# Altium PCB RFID_DC_Pcb.PcbDoc
Units mm, origin at the board's own origin, x right, y up, seen from the top; angles counter-clockwise.
Board outline 82.83 x 45.4 mm, 2 copper layers (Top Layer, Bottom Layer); 45 components, 53 nets, 225 pads, 34 vias.
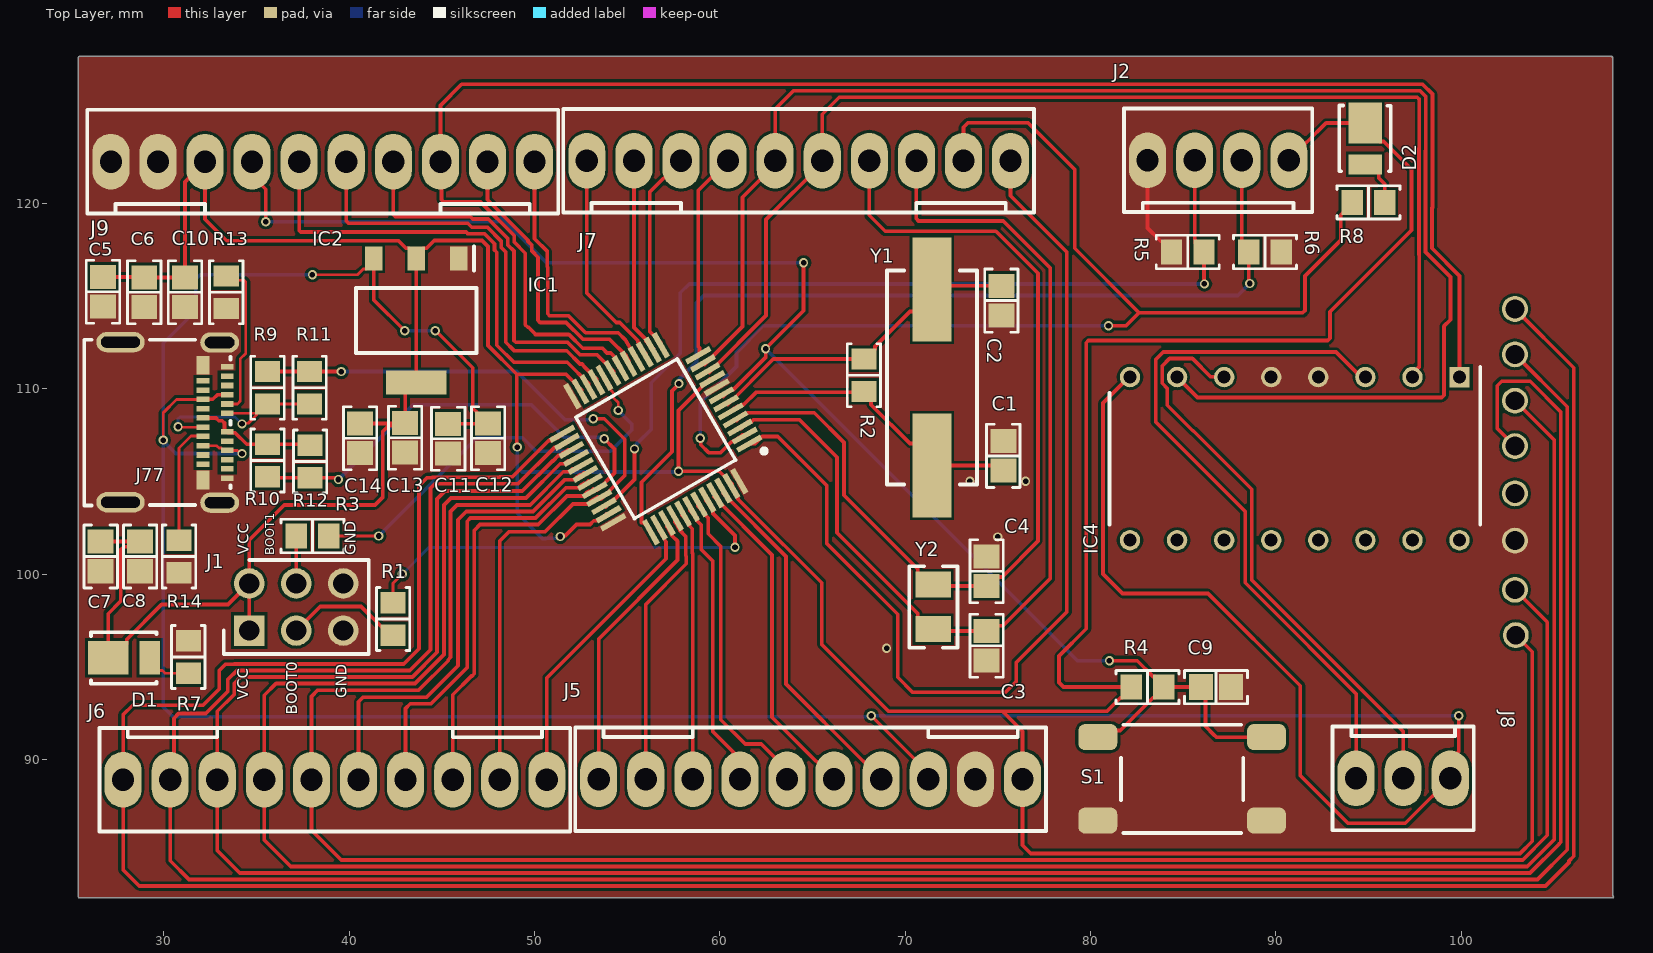
[diagram p0: Top Layer view]
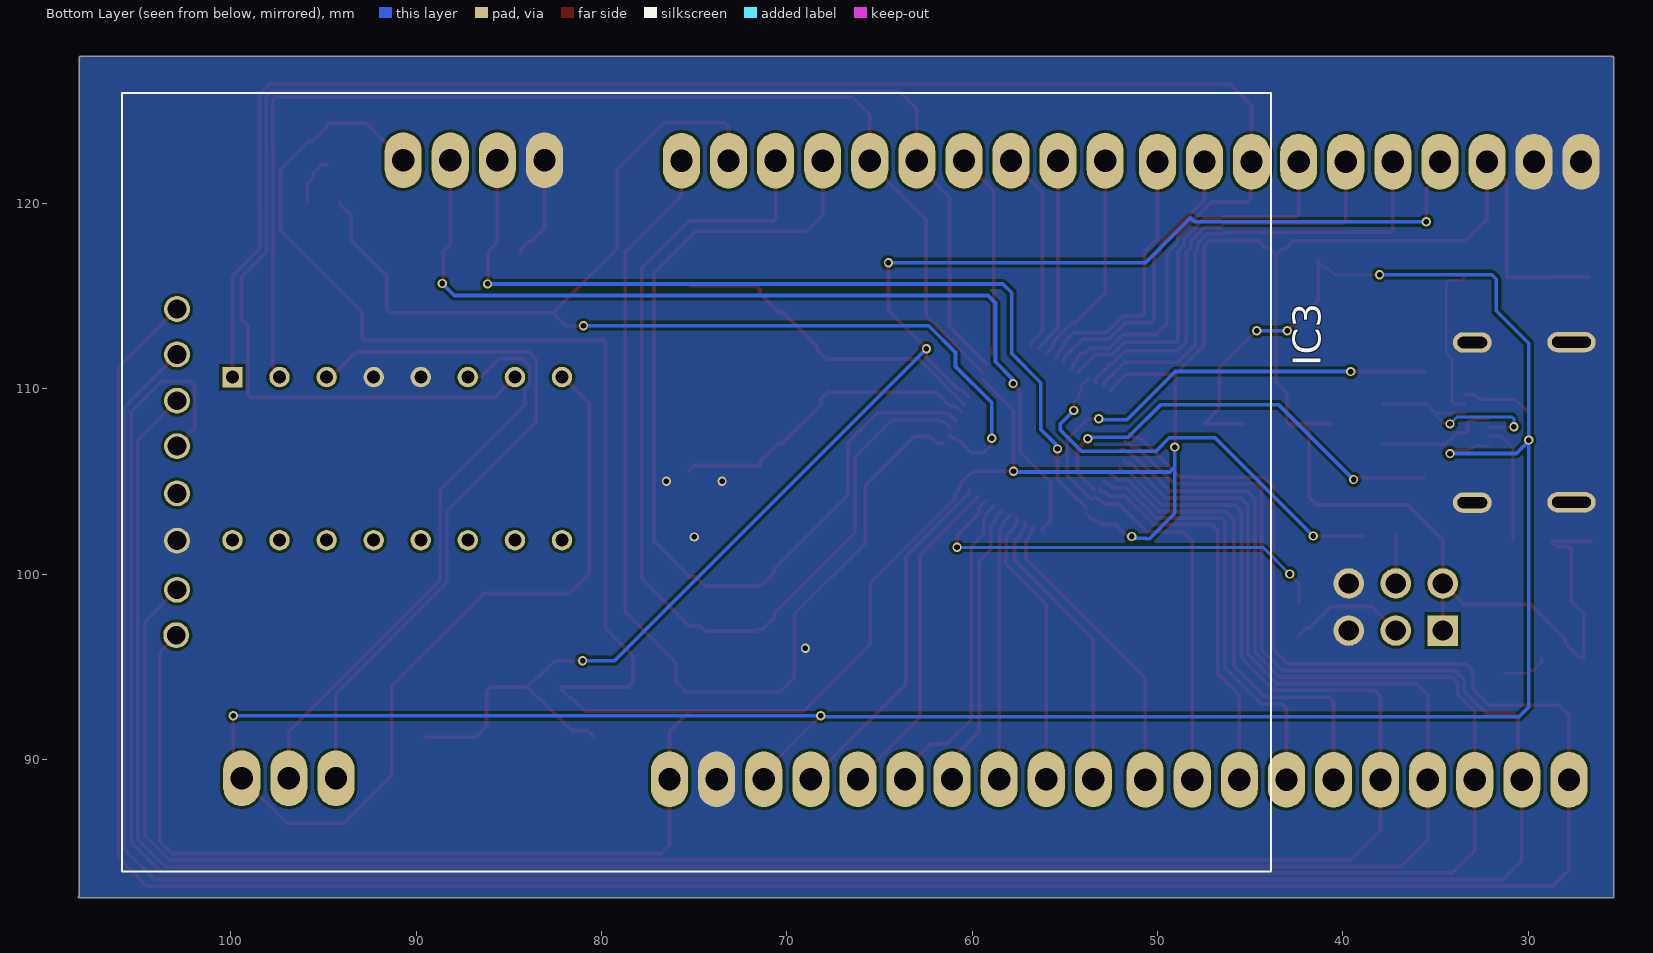
[diagram p1: Bottom Layer view, seen from below]
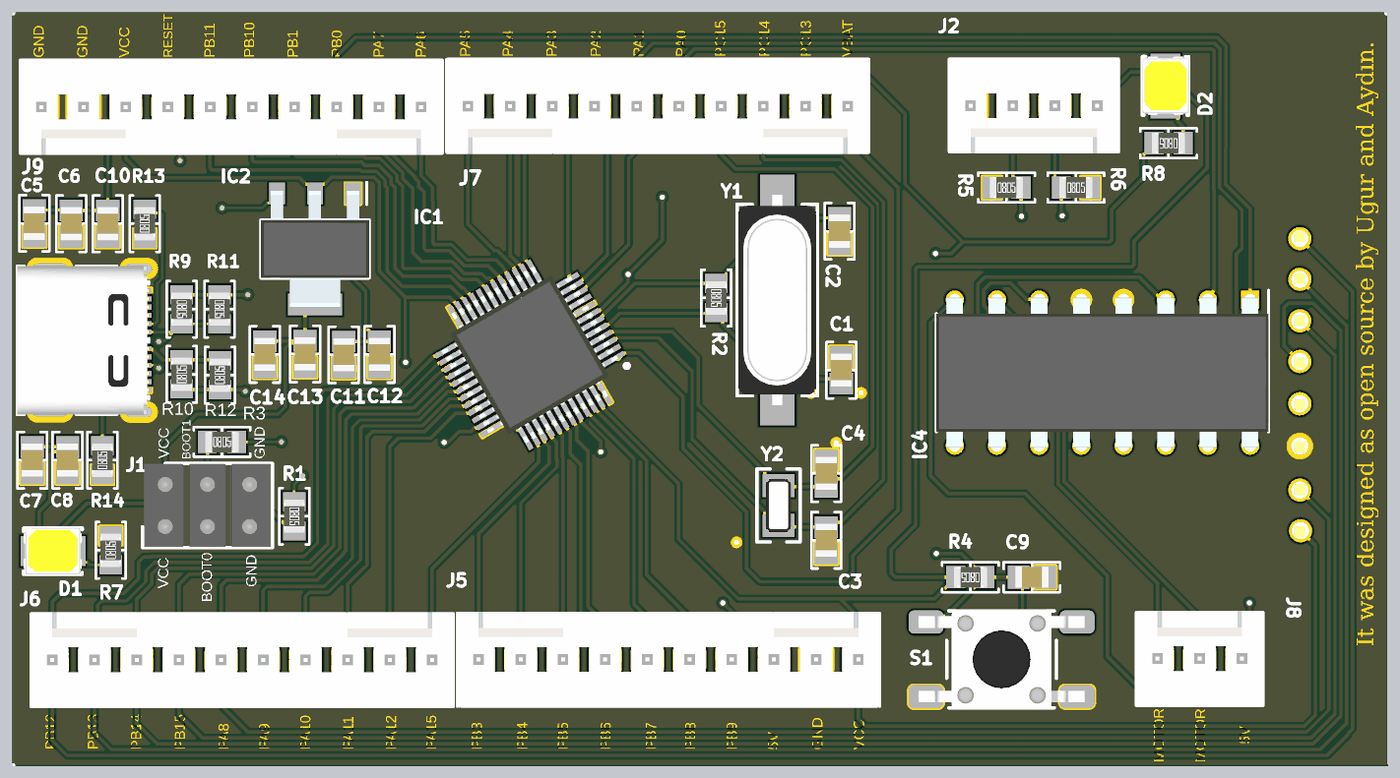
[diagram p2: 3D render of the assembled board from above, using the file's embedded part models]

## Layer stack, top to bottom
Top Solder: solder mask 0.0102, Solder Resist, Dk 3.5
Top Layer: signal copper 0.0356
Dielectric 1: dielectric 0.32, FR-4, Dk 4.8
Bottom Layer: signal copper 0.0356
Bottom Solder: solder mask 0.0102, Solder Resist, Dk 3.5

## Board outline
25.45,82.525 cw(c25.45,82.575) 25.4,82.575 25.4,127.875 cw(c25.45,127.875) 25.45,127.925 108.125,127.925 cw(c108.125,127.875) 108.175,127.875 108.175,82.625 cw(c108.175,82.575) 108.225,82.575 cw(c108.175,82.575) 108.175,82.525

## Design rules (kind name [scope] priority, off if disabled: settings)
Clearance [All] p1: gap=0.152 ignorepadtopadclearanceinfootprint=FALSE
PolygonConnect [All] p1: connectstyle=Direct reliefconductorwidth=0.254 reliefentries=4 polygonreliefangle="90 Angle" airgapwidth=0.254
RoutingVias [All] p1: holewidth=0.5 width=0.8 viastyle="Through Hole" minholewidth=0.3 minwidth=0.5 maxholewidth=1 maxwidth=2
SolderMaskExpansion [All] p1: expansion=0.102 istentingtop=FALSE
Width [All] p1: maxlimit=3 minlimit=0.152 preferedwidth=0.2
30 further rules are at their usual default settings.

## Components (designator, comment, footprint, x,y, rotation, side; value= is the part's Value field where it differs from the comment)
C1 "20pF" "CAP 0805_2012" 75.3,106.375 r270 top
C2 "20pF" "CAP 0805_2012" 75.2,114.75 r90 top
C3 "20pF" "CAP 0805_2012" 74.4,96.125 r90 top
C4 "20pF" "CAP 0805_2012" 74.4,100.15 r270 top
C5 "100nF" "CAP 0805_2012" 26.725,115.225 r90 top
C6 "100nF" "CAP 0805_2012" 28.95,115.2 r90 top
C7 "100nF" "CAP 0805_2012" 26.6,100.95 r90 top
C8 "100nF" "CAP 0805_2012" 28.725,100.95 r90 top
C9 "100nF" "CAP 0805_2012" 86.775,93.9 r180 top
C10 "100nF" "CAP 0805_2012" 31.15,115.2 r90 top
C11 "100nF" "CAP 0805_2012" 45.35,107.3 r90 top
C12 "100nF" "CAP 0805_2012" 47.5,107.325 r90 top
C13 "100nF" "CAP 0805_2012" 43.025,107.35 r90 top
C14 "100nF" "CAP 0805_2012" 40.6,107.325 r90 top
D1 "LED" "CREE J 2835" 27.975,95.475 r180 top
D2 "LED1" "CREE J 2835" 94.825,123.375 r90 top
IC1 "STM32F103C8T6TR" QFP50P900X900X160-48N 56.55,107.3 r210 top
IC2 "AMS1117-3.3" SOT229P700X180-4N 43.625,113.675 r270 top
IC3 "MFRC522 MODULE" RC522 74.375,101.45 r90 bottom
IC4 "L293D" DIP880W50P254L2000H510Q16N 91.025,106.225 r270 top
J1 "0901310763" HDRV6W90P254_2X3_762X500X560P 34.61,96.95 r0 top
J2 "0022272041" "MOLEX KK 0022272041" 86.895,122.325 r0 top
J5 "0022272101" "MOLEX KK 0022272101" 64.9,88.925 r180 top
J6 "0022272101" "MOLEX KK 0022272101" 39.24,88.9 r180 top
J7 "0022272101" "MOLEX KK 0022272101" 64.26,122.3 r0 top
J8 "0022272031" "MOLEX KK 0022272031" 96.875,88.975 r180 top
J9 "0022272101" "MOLEX KK 0022272101" 38.58,122.25 r0 top
J77 "1054500101" "Molex 1054500101" 32.774,108.172 r270 top
R1 "100K" "RES 0805_2012" 42.375,97.575 r270 top
R2 "1M" "RES 0805_2012" 67.775,110.725 r270 top
R3 "100K" "RES 0805_2012" 38.025,102.05 r0 top
R4 "10K" "RES 0805_2012" 83.075,93.9 r180 top
R5 "10K" "RES 0805_2012" 85.25,117.375 r0 top
R6 "10K" "RES 0805_2012" 89.425,117.375 r0 top
R7 "100" "RES 0805_2012" 31.325,95.525 r90 top
R8 "100" "RES 0805_2012" 95,120.05 r180 top
R9 "22" "RES 0805_2012" 35.6,110.05 r270 top
R10 "=Value" "RES 0805_2012" 35.6,106.125 r90 top
R11 "=Value" "RES 0805_2012" 37.875,110.05 r270 top
R12 "=Value" "RES 0805_2012" 37.9,106.075 r90 top
R13 "=Value" "RES 0805_2012" 33.375,115.2 r90 top
R14 "=Value" "RES 0805_2012" 30.825,100.95 r90 top
S1 "FSM4JSMA" "TE FSM4JSMA" 84.95,88.95 r270 top
Y1 "8MHz" "ABRACON ABLS" 71.45,110.6 r270 top
Y2 "32.768kHz" "ABRACON ABS07" 71.525,98.225 r90 top

## Footprints (in the part's own frame and the unit in brackets; to place one, negate y for a bottom-side part, rotate by r counter-clockwise, add the part's x,y. Pads: shape width x height; smd on the part's side, far side on the other; paste and mask are expansions set on the pad)
"ABRACON ABLS" [mm] "Crystal, 2-Leads, Body 4.70x11.40mm, Pitch 8.80mm, IPC Medium Density"
  rect 5.6x2.1 smd: 1(-4.75,0) 2(4.75,0)
  silkscreen extent -5.77,-2.43 5.77,2.43, body extent -6.35,-2.35 6.35,2.35, height 4.2
"ABRACON ABS07" [mm] "Crystal, 2-Leads, Body 3.20x1.50mm, IPC Medium Density"
  rect 1.4x1.9 smd: 1(-1.2,0) 2(1.2,0)
  silkscreen extent -2.2,-1.3 2.2,1.3, body extent -1.62,-0.77 1.63,0.78, height 0.9
"CAP 0805_2012" [mm] "Chip Capacitor, 2-Leads, Body 2.00x1.20mm, IPC Medium Density"
  rect 1.3x1.4 smd: 1(-0.8,0) 2(0.8,0)
  silkscreen extent -1.7,-0.9 1.7,0.9, body extent -1,-0.64 1,0.64, height 1.26
"CREE J 2835" [mm] "LED, 2-Leads, Body 3.5x2.8mm, CREE JE2835AWT-00-0000-000A0ZF627E"
  rect 2.2x1.8 smd: 1(0.962,0)
  rect 1.1x1.8 smd: 2(-1.278,0)
  silkscreen extent -1.64,-1.39 1.9,1.4, body extent -1.62,-1.4 1.9,1.4, height 0.7
DIP880W50P254L2000H510Q16N [mm]
  rect 1.1x1.1 hole 0.7: 1(-4.4,8.89)
  round 1.1 hole 0.7: 2(-4.4,6.35) 3(-4.4,3.81) 4(-4.4,1.27) 5(-4.4,-1.27) 6(-4.4,-3.81) 7(-4.4,-6.35) 8(-4.4,-8.89) 9(4.4,-8.89) 10(4.4,-6.35) 11(4.4,-3.81) 12(4.4,-1.27) 13(4.4,1.27) 14(4.4,3.81) 15(4.4,6.35) 16(4.4,8.89)
  silkscreen extent -4.95,-10 3.55,10, body extent -4.52,-10 4.52,10, height 5.1
HDRV6W90P254_2X3_762X500X560P [mm]
  rect 1.65x1.65 hole 1.1: 1(0,0)
  round 1.65 hole 1.1: 2(0,2.54) 3(2.54,0) 4(2.54,2.54) 5(5.08,0) 6(5.08,2.54)
  silkscreen extent -1.37,-1.27 6.45,3.81, body extent -1.27,-1.23 6.35,3.77, height 5.6
"Molex 1054500101" [mm] "USB-C Receptacle Connector 24 Position Surface Mount, 24 Position, Body 8.94x7.90mm"
  rect 0.3x0.7 smd: A1(-3,0.655) A2(-2.5,0.655) A3(-2,0.655) A4(-1.5,0.655) A5(-1,0.655) A6(-0.5,0.655) A7(0.5,0.655) A8(1,0.655) A9(1.5,0.655) A10(2,0.655) A11(2.5,0.655) A12(3,0.655) B2(2.25,-0.645) B3(1.75,-0.645) B4(1.25,-0.645) B5(0.75,-0.645) B6(0.25,-0.645) B7(-0.25,-0.645) B8(-0.75,-0.645) B9(-1.25,-0.645) B10(-1.75,-0.645) B11(-2.25,-0.645)
  rect 1x0.7 smd: B1(3.1,-0.655) B12(-3.1,-0.645)
  oval 1.1x2.6 hole 2.1 slot 0.6 at 0 deg unplated: S(-4.34,-5.105) S(4.3,-5.105)
  oval 1.1x2.1 hole 1.6 slot 0.6 at 0 deg unplated: S(-4.32,0.245) S(4.32,0.245)
  silkscreen extent -4.47,-7.07 4.47,0.83, body extent -4.47,-7.07 4.47,0.83, height 3.21
"MOLEX KK 0022272031" [mm]
  oval 2x3 hole 1.2: 1(-2.54,0) 2(0,0) 3(2.54,0)
  silkscreen extent -3.81,-2.79 3.81,2.79, body extent -3.81,-2.9 3.81,2.9, height 11.7
"MOLEX KK 0022272041" [mm]
  oval 2x3 hole 1.2: 1(-3.81,0) 2(-1.27,0) 3(1.27,0) 4(3.81,0)
  silkscreen extent -5.08,-2.79 5.08,2.79, body extent -5.08,-2.9 5.08,2.9, height 11.7
"MOLEX KK 0022272101" [mm]
  oval 2x3 hole 1.2: 1(-11.43,0) 2(-8.89,0) 3(-6.35,0) 4(-3.81,0) 5(-1.27,0) 6(1.27,0) 7(3.81,0) 8(6.35,0) 9(8.89,0) 10(11.43,0)
  silkscreen extent -12.7,-2.79 12.7,2.79, body extent -12.7,-2.9 12.7,2.9, height 11.7
QFP50P900X900X160-48N [mm]
  rect 1.475x0.3 smd: 1(-4.238,2.75) 2(-4.238,2.25) 3(-4.238,1.75) 4(-4.238,1.25) 5(-4.238,0.75) 6(-4.238,0.25) 7(-4.238,-0.25) 8(-4.238,-0.75) 9(-4.238,-1.25) 10(-4.238,-1.75) 11(-4.238,-2.25) 12(-4.238,-2.75) 25(4.238,-2.75) 26(4.238,-2.25) 27(4.238,-1.75) 28(4.238,-1.25) 29(4.238,-0.75) 30(4.238,-0.25) 31(4.238,0.25) 32(4.238,0.75) 33(4.238,1.25) 34(4.238,1.75) 35(4.238,2.25) 36(4.238,2.75)
  rect 0.3x1.475 smd: 13(-2.75,-4.238) 14(-2.25,-4.238) 15(-1.75,-4.238) 16(-1.25,-4.238) 17(-0.75,-4.238) 18(-0.25,-4.238) 19(0.25,-4.238) 20(0.75,-4.238) 21(1.25,-4.238) 22(1.75,-4.238) 23(2.25,-4.238) 24(2.75,-4.238) 37(2.75,4.238) 38(2.25,4.238) 39(1.75,4.238) 40(1.25,4.238) 41(0.75,4.238) 42(0.25,4.238) 43(-0.25,4.238) 44(-0.75,4.238) 45(-1.25,4.238) 46(-1.75,4.238) 47(-2.25,4.238) 48(-2.75,4.238)
  silkscreen extent -4.85,-3.15 3.15,3.62, body extent -4.5,-4.5 4.5,4.5, height 1.6
RC522 [mil] "RFID"
  round 55 hole 40: 1(-187.01,1125) 2(-90.55,1123.25) 3(13.78,1123.23) 4(114.17,1123.25) 5(214.57,1123.25) 6(311.02,1123.25) 7(409.45,1123.25) 8(506,1123.25)
  silkscreen extent -689,-1201 965,1240, body extent -643,-1151 931,1211, height 423
"RES 0805_2012" [mm] "Chip Resistor, 2-Leads, Body 2.00x1.25mm, IPC Medium Density"
  rect 1.15x1.35 smd: 1(-0.875,0) 2(0.875,0)
  silkscreen extent -1.7,-0.9 1.7,0.9, body extent -1,-0.62 1,0.63, height 0.6
SOT229P700X180-4N [mm]
  rect 1.3x0.95 smd: 1(-3.35,2.29) 2(-3.35,0) 3(-3.35,-2.29)
  rect 1.3x3.25 smd: 4(3.35,0)
  silkscreen extent -4,-3.25 1.75,3.25, body extent -3.5,-3.25 3.5,3.25, height 1.8
"TE FSM4JSMA" [mm]
  rrect50% 1.4x2.1 smd: 1(2.25,4.55) 2(2.25,-4.55) 3(-2.25,4.55) 4(-2.25,-4.55)
  silkscreen extent -2.92,-3.3 2.92,3.3, body extent -3,-5 3,5, height 5.08

## Part data
C1 C2 C3 C4 C5 C6 C7 C8 C9 C10 C11 C12 C13 C14: library part C0805C104M4VACTU, "CAP CER 0.1UF 16V Y5V 0805", Capacitance=0.1µF, Device Package="0805 (2012 Metric)", Manufacturer=KEMET, Operating Temperature="-30°C ~ 85°C", Supplier Part Number 1=399-9156-1-ND, Temperature Coefficient="Y5V (F)", Tolerance=±20%, Voltage - Rated=16V, Applications="General Purpose", ComponentLink1Description=Datasheet, ComponentLink1URL=https://api.kemet.com/component-edge/download/datasheet/C0805C104M4VACTU.pdf, ComponentLink2Description="DigiKey Link", ComponentLink2URL=http://digikey.com/product-detail/en/kemet/C0805C104M4VACTU/399-9156-1-ND/3522674, LastUpdated="2.09.2020 01:04:38", Lifecycle Status=Active, Minimum Order=1, Mounting Type="Surface Mount, MLCC", Package / Case="0805 (2012 Metric)", Packaging=TapeAndReel, Part Number=C0805C104M4VACTU, Part Status=Active, PartId=4429, Price=0.02, Series="SMD Comm Y5V", Size / Dimension="0.079\" L x 0.049\" W (2.00mm x 1.25mm)", Supplier 1=DigiKey, Thickness (Max)="0.035\" (0.88mm)"
D1 D2: library part JE2835AWT-R-U40GA0000-N0000001, "LED WHITE  4000K JE2835 3V", CRI (Color Rendering Index)=90, Current - Max=240mA, Current - Test=150mA, Device Package="1113 (2835 Metric)", Flux @ 25°C, Current - Test="62lm (Typ)", Flux @ 85°C, Current - Test="53lm (Typ)", Lumens/Watt @ Current - Test="140 lm/W", Manufacturer="Cree Inc.", Supplier Device Package=SMD, Supplier Part Number 1=2138-JE2835AWT-R-U40GA0000-N0000001CT-ND, Voltage - Forward (Vf) (Typ)=2.95V, CCT (K)="4000K 3-Step MacAdam Ellipse", ComponentLink1Description=Datasheet, ComponentLink1URL=https://www.cree.com/led-components/media/documents/data-sheet-JSeries-2835-3v.pdf, ComponentLink2Description="DigiKey Link", ComponentLink2URL=http://digikey.com/product-detail/en/cree-inc/JE2835AWT-R-U40GA0000-N0000001/2138-JE2835AWT-R-U40GA0000-N0000001CT-ND/10820356, LastUpdated="2.09.2020 01:30:24", Lifecycle Status=Active, Minimum Order=1, Mounting Type="Surface Mount", Package / Case="1113 (2835 Metric)", Packaging=TapeAndReel, Part Number=JE2835AWT-R-U40GA0000-N0000001, Part Status="1113 (2835 Metric)", PartId=58, Price=0.02, Series=J, Supplier 1=DigiKey, Viewing Angle=120°
IC1: "Integrated Circuit", Manufacturer_Name=STMicroelectronics, Mouser Part Number=511-STM32F103C8T6TR, Arrow Part Number=STM32F103C8T6TR, Arrow Price/Stock=https://www.arrow.com/en/products/stm32f103c8t6tr/stmicroelectronics, Datasheet Link=http://media.digikey.com/pdf/Data%20Sheets/ST%20Microelectronics%20PDFS/STM32F103x8,B.pdf, Height=1.6mm, Manufacturer_Part_Number=STM32F103C8T6TR, Mouser Price/Stock=https://www.mouser.co.uk/ProductDetail/STMicroelectronics/STM32F103C8T6TR?qs=5HwTSiuA5HDxFj62n06yag%3D%3D
IC2: "Integrated Circuit", Manufacturer_Name="Advanced Monolithic Systems", Datasheet Link=http://www.advanced-monolithic.com/pdf/ds1117.pdf, Height=1.8mm, Manufacturer_Part_Number=AMS1117-3.3
IC3: "RFID MODULE"
IC4: "Integrated Circuit", Manufacturer_Name=STMicroelectronics, Mouser Part Number=511-L293D, Arrow Part Number=L293D, Arrow Price/Stock=https://www.arrow.com/en/products/l293d/stmicroelectronics, Datasheet Link=http://www.st.com/web/en/resource/technical/document/datasheet/CD00000059.pdf, Height=5.1mm, Manufacturer_Part_Number=L293D, Mouser Price/Stock=https://www.mouser.co.uk/ProductDetail/STMicroelectronics/L293D/?qs=gr8Zi5OG3MgMJ1ICDzLQbg%3D%3D
J1: "Connector", Manufacturer_Name=Molex, Mouser Part Number=N/A, Arrow Part Number=0901310763, Arrow Price/Stock=https://www.arrow.com/en/products/0901310763/molex, Datasheet Link=http://www.molex.com/pdm_docs/sd/901310763_sd.pdf, Height=5.6mm, Manufacturer_Part_Number=0901310763, Mouser Price/Stock=https://www.mouser.co.uk/ProductDetail/Molex/0901310763?qs=PBcRNPEHKsoEorZjX1Xqdw%3D%3D
J2: "CONN HEADER VERT 4POS 2.54MM", Manufacturer=Molex, Material Flammability Rating="UL94 V-0", Supplier Part Number 1=WM4113-ND, Insulation Color=Natural, ComponentLink1Description=Datasheet, ComponentLink1URL=https://www.molex.com/pdm_docs/sd/022272041_sd.pdf, ComponentLink2Description="DigiKey Link", ComponentLink2URL=http://digikey.com/product-detail/en/molex/0022272041/WM4113-ND/1130579, Connector Type=Header, Contact Finish - Mating=Tin, Contact Finish - Post=Tin, Contact Finish Thickness - Mating="100.0µin (2.54µm)", Contact Length - Mating="0.295\" (7.49mm)", Contact Length - Post="0.140\" (3.56mm)", Contact Material=Brass, Contact Shape=Square, Contact Type="Male Pin", Fastening Type="Friction Lock", LastUpdated="12.01.2020 23:52:05", Lifecycle Status=Active, Minimum Order=1, Mounting Type="Through Hole", Number of Positions=4, Number of Positions Loaded=All, Number of Rows=1, Overall Contact Length="0.560\" (14.22mm)", Packaging=Bulk, Part Number=0022272041, Part Status=Active, PartId=78, Pitch - Mating="0.100\" (2.54mm)", Price=0.40, Series="KK 6410", Shrouding="Shrouded - 1 Wall", Style="Board to Cable/Wire", Supplier 1=DigiKey, Termination=Solder, Insulation Height="0.461\" (11.70mm)", Insulation Material="Polyamide (PA), Nylon"
J5 J6 J7 J9: "CONN HEADER VERT 10POS 2.54MM", Manufacturer=Molex, Material Flammability Rating="UL94 V-0", Supplier Part Number 1=WM4119-ND, Insulation Color=Natural, ComponentLink1Description=Datasheet, ComponentLink1URL=https://www.molex.com/pdm_docs/sd/022272101_sd.pdf, ComponentLink2Description="DigiKey Link", ComponentLink2URL=http://digikey.com/product-detail/en/molex/0022272101/WM4119-ND/1130585, Connector Type=Header, Contact Finish - Mating=Tin, Contact Finish - Post=Tin, Contact Finish Thickness - Mating="100.0µin (2.54µm)", Contact Length - Mating="0.295\" (7.49mm)", Contact Length - Post="0.140\" (3.56mm)", Contact Material=Brass, Contact Shape=Square, Contact Type="Male Pin", Fastening Type="Friction Lock", LastUpdated="12.01.2020 23:53:02", Lifecycle Status=Active, Minimum Order=1, Mounting Type="Through Hole", Number of Positions=10, Number of Positions Loaded=All, Number of Rows=1, Overall Contact Length="0.560\" (14.22mm)", Packaging=Bulk, Part Number=0022272101, Part Status=Active, PartId=84, Pitch - Mating="0.100\" (2.54mm)", Price=0.73, Series="KK 6410", Shrouding="Shrouded - 1 Wall", Style="Board to Cable/Wire", Supplier 1=DigiKey, Termination=Solder, Insulation Height="0.461\" (11.70mm)", Insulation Material="Polyamide (PA), Nylon"
J8: "CONN HEADER VERT 3POS 2.54MM", Manufacturer=Molex, Material Flammability Rating="UL94 V-0", Supplier Part Number 1=WM4112-ND, Insulation Color=Natural, ComponentLink1Description=Datasheet, ComponentLink1URL=https://www.molex.com/pdm_docs/sd/022272031_sd.pdf, ComponentLink2Description="DigiKey Link", ComponentLink2URL=http://digikey.com/product-detail/en/molex/0022272031/WM4112-ND/1130578, Connector Type=Header, Contact Finish - Mating=Tin, Contact Finish - Post=Tin, Contact Finish Thickness - Mating="100.0µin (2.54µm)", Contact Length - Mating="0.295\" (7.49mm)", Contact Length - Post="0.140\" (3.56mm)", Contact Material=Brass, Contact Shape=Square, Contact Type="Male Pin", Fastening Type="Friction Lock", LastUpdated="12.01.2020 23:51:54", Lifecycle Status=Active, Minimum Order=1, Mounting Type="Through Hole", Number of Positions=3, Number of Positions Loaded=All, Number of Rows=1, Overall Contact Length="0.560\" (14.22mm)", Packaging=Bulk, Part Number=0022272031, Part Status=Active, PartId=77, Pitch - Mating="0.100\" (2.54mm)", Price=0.37, Series="KK 6410", Shrouding="Shrouded - 1 Wall", Style="Board to Cable/Wire", Supplier 1=DigiKey, Termination=Solder, Insulation Height="0.461\" (11.70mm)", Insulation Material="Polyamide (PA), Nylon"
J77: "CONN RCP USB3.1 TYPEC 24P SMD RA", Current Rating (Amps)="0.25A, 1A, 5A", Manufacturer=Molex, Operating Temperature="-30°C ~ 85°C", Supplier Part Number 1=WM12856CT-ND, Voltage - Rated=30VAC/DC, ComponentLink1Description=Datasheet, ComponentLink1URL=https://www.molex.com/pdm_docs/ps/PS-105448-001.pdf, ComponentLink2Description="DigiKey Link", ComponentLink2URL=http://digikey.com/product-detail/en/molex/1054500101/WM12856CT-ND/5843891, Connector Type="USB - C (Type - C)", Gender=Receptacle, LastUpdated="6.06.2020 02:14:04", Lifecycle Status=Active, Mating Cycles=10000, Minimum Order=1, Mounting Feature=Horizontal, Mounting Type="Surface Mount, Right Angle; Through Hole", Number of Contacts=24, Number of Ports=1, Packaging=TapeAndReel, Part Number=1054500101, Part Status=Active, Price=1.22, Series=105445, Shielding=Shielded, Specifications="USB 3.1 (USB 3.1 Gen 2, Superspeed+)", Supplier 1=DigiKey, Termination=Solder
R1 R2 R3 R4 R5 R6 R7 R8 R9 R10 R11 R12 R13 R14: library part RMCF0805FT931K, "RES 931K OHM 1% 1/8W 0805", Device Package="0805 (2012 Metric)", Manufacturer="Stackpole Electronics Inc", Operating Temperature="-55°C ~ 155°C", Power (Watts)="0.125W, 1/8W", Ratings=AEC-Q200, Resistance="931 kOhms", Supplier Device Package=0805, Supplier Part Number 1=RMCF0805FT931KCT-ND, Temperature Coefficient=±100ppm/°C, Tolerance=±1%, ComponentLink1Description=Datasheet, ComponentLink1URL=https://www.seielect.com/catalog/sei-rmcf_rmcp.pdf, ComponentLink2Description="DigiKey Link", ComponentLink2URL=http://digikey.com/product-detail/en/stackpole-electronics-inc/RMCF0805FT931K/RMCF0805FT931KCT-ND/2418483, Composition="Thick Film", Features="Automotive AEC-Q200", Height - Seated (Max)="0.026\" (0.65mm)", LastUpdated="2.09.2020 01:15:05", Lifecycle Status=Active, Minimum Order=1, Number of Terminations=2, Package / Case="0805 (2012 Metric)", Packaging=CutTape, Part Number=RMCF0805FT931K, Part Status=Active, PartId=36342, Price=0.10, Series=RMCF, Size / Dimension="0.079\" L x 0.049\" W (2.00mm x 1.25mm)", Supplier 1=DigiKey
S1: "SWITCH TACTILE SPST-NO 0.05A 24V", Contact Rating @ Voltage="0.05A @ 24VDC", Manufacturer="TE Connectivity ALCOSWITCH Switches", Operating Force=160gf, Operating Temperature="-35°C ~ 85°C", Supplier Part Number 1=450-1129-ND, Actuator Height off PCB, Vertical=5.00mm, Actuator Orientation="Top Actuated", Actuator Type=Standard, Circuit=SPST-NO, ComponentLink1Description=Datasheet, ComponentLink1URL=https://www.te.com/commerce/DocumentDelivery/DDEController?Action=srchrtrv&DocNm=1308111-1_SWITCHES_CORE_PROGRAM_CATALOG&DocType=CS&DocLang=English, ComponentLink2Description="DigiKey Link", ComponentLink2URL=http://digikey.com/product-detail/en/te-connectivity-alcoswitch-switches/FSM4JSMA/450-1129-ND/525821, LastUpdated="2.09.2020 01:27:07", Lifecycle Status=Active, Minimum Order=1, Mounting Type="Surface Mount", Outline="6.00mm x 6.00mm", Packaging=Bulk, Part Number=FSM4JSMA, Part Status=Active, Price=0.23, Series=FSMJSMA, Supplier 1=DigiKey, Switch Function=Off-Mom, Termination Style="Gull Wing", Illumination=Non-Illuminated
Y1: library part ABLS-8.000MHZ-D-T, "CRYSTAL 8.0000MHZ 18PF SMD", ESR (Equivalent Series Resistance)="80 Ohms", Frequency Stability=±50ppm, Load Capacitance=18pF, Manufacturer="Abracon LLC", Operating Mode=Fundamental, Operating Temperature="-40°C ~ 85°C", Package / Case=HC-49/US, Supplier Part Number 1=535-13445-2-ND, ComponentLink1Description=Datasheet, ComponentLink1URL=https://abracon.com/Resonators/abls.pdf, ComponentLink2Description="DigiKey Link", ComponentLink2URL=http://digikey.com/product-detail/en/abracon-llc/ABLS-8.000MHZ-D-T/535-13445-2-ND/5980041, Frequency=8MHz, Frequency Tolerance=±50ppm, Height - Seated (Max)="0.165\" (4.20mm)", LastUpdated="2.09.2020 01:21:45", Lifecycle Status=Active, Minimum Order=0, Mounting Type="Surface Mount", Packaging=TapeAndReel, Part Number=ABLS-8.000MHZ-D-T, Part Status=Active, PartId=98, Price=0.18, Series=ABLS, Size / Dimension="0.449\" L x 0.185\" W (11.40mm x 4.70mm)", Supplier 1=DigiKey, Type="MHz Crystal"
Y2: library part ABS07-32.768KHZ-9-1-T, "CRYSTAL 32.768KHZ 9PF SMD", ESR (Equivalent Series Resistance)="70 kOhms", Frequency Tolerance=±10ppm, Load Capacitance=9pF, Manufacturer="Abracon LLC", Operating Mode=Fundamental, Operating Temperature="-40°C ~ 85°C", Package / Case="2-SMD, No Lead", Supplier Part Number 1=535-13479-1-ND, ComponentLink1Description=Datasheet, ComponentLink1URL=https://abracon.com/Resonators/ABS07.pdf, ComponentLink2Description="DigiKey Link", ComponentLink2URL=http://digikey.com/product-detail/en/abracon-llc/ABS07-32.768KHZ-9-1-T/535-13479-1-ND/5980155, Frequency=32.768kHz, Height - Seated (Max)="0.035\" (0.90mm)", LastUpdated="2.09.2020 01:21:47", Lifecycle Status=Active, Minimum Order=0, Mounting Type="Surface Mount", Packaging=TapeAndReel, Part Number=ABS07-32.768KHZ-9-1-T, Part Status=Active, PartId=380, Price=0.55, Series=ABS07, Size / Dimension="0.126\" L x 0.059\" W (3.20mm x 1.50mm)", Supplier 1=DigiKey, Type="kHz Crystal (Tuning Fork)"

## Via types
v1: diameter 0.5, hole 0.3, Top Layer to Bottom Layer, tented both sides, 30 vias
v2: diameter 0.5, hole 0.3, Top Layer to Bottom Layer, 4 vias

## Nets (pads, with @x,y where several pads share a name; then routed paths per layer and width w, separated by ;. In a path a pad name is that pad's centre, name@x,y a point inside that pad or via, vN(x,y) a via of type N, cw(c..) or ccw(c..) an arc to the next point about the centre after c; other vN are vias at no path point)
5V: C11.2 C12.2 IC2.3 IC4.8 J5.3 J8.1 J77.A4 J77.A9 J77.B4 J77.B9 | length 178.7
  Top Layer w0.152: v1(29.975,107.225) 29.975,108.7 30.697,109.422 J77.B9 ; J77.B4 32.857,106.922 32.985,106.794 33.107,106.794 33.229,106.672 J77.A9 33.975,106.672 34.147,106.5 v1(34.225,106.5) ; v1(38.025,116.15) 40.46,116.15 40.763,116.453 40.936,116.453 41.335,116.852 IC2.3 ; IC4.8 IC4.8@82.31,110.8
  Top Layer w0.2: J77.B9 32.132,109.425 32.65,109.425 32.897,109.672 J77.A4 ; IC2.3@41.335,116.852 41.335,114.79 v1(43,113.125) ; v1(44.65,113.125) 44.675,113.125 46.675,111.125 46.675,108.95 46.9,108.725 46.9,108.675 47.45,108.125 C12.2 47.475,108.1 C11.2 ; v1(68.175,92.35) 71.25,89.275 J5.3 J5.3@71.283,88.892 ; IC4.8 82.075,110.625 80.675,109.225 80.675,100 81.725,98.95 86.35,98.95 91.325,93.975 91.325,89.125 93.9,86.55 96.99,86.55 98.446,88.006 98.459,88.006 99.415,88.962 J8.1 99.415,89.962 99.875,90.422 v1(99.875,92.35)
  Bottom Layer w0.2: v1(34.225,106.5) 30.65,106.5 v1@29.975,107.175 ; v1(38.025,116.15) 31.975,116.15 31.725,115.9 31.725,114.201 29.975,112.451 v1(29.975,107.225) v1@29.975,107.175 ; v1(43,113.125) v1(44.65,113.125) ; v1(99.875,92.35) v1(68.175,92.35) 68.125,92.3 30.5,92.3 29.975,92.825 v1@29.975,107.175
BOOT0: IC1.44 R1.1 | length 23.5
  Top Layer w0.152: R1.1 42.375,99.5 v1(42.875,100)
  Top Layer w0.2: IC1.44@59.261,103.948 59.636,103.573 59.636,103.264 60.825,102.075 v1(60.825,101.45)
  Bottom Layer w0.152: v1(42.875,100) 44.3,101.425 60.8,101.425 v1(60.825,101.45)
BOOT1: IC1.20 R3.2 | length 22.7
  Top Layer w0.152: R3.2 v1(41.6,102.05) ; IC1.20@53.724,110.538 54.099,110.164 54.099,109.958 54.159,109.898 54.159,109.891 54.275,109.775 54.275,109.5 54.525,109.25 v1(54.525,108.825)
  Bottom Layer w0.2: v1(41.6,102.05) 46.902,107.352 49.366,107.352 50.093,106.625 54.1,106.625 55.25,107.775 55.25,108.1 v1(54.525,108.825)
D+: J77.A6 J77.B6 R9.2 R11.2 | length 11.2
  Top Layer w0.152: v1(30.775,107.95) 30.803,107.922 J77.B6 ; J77.A6 34.997,108.672 R9.2@35.001,108.676 ; v1(34.225,108.1) 34.261,108.136 34.561,108.136 35.001,108.576 R9.2@35.001,108.676 ; R11.2 R9.2 35.5,109.175 R9.2@35.001,108.676
  Bottom Layer w0.152: v1(30.775,107.95) 30.775,108.375 30.875,108.475 33.85,108.475 v1(34.225,108.1)
D-: J77.A7 J77.B7 R10.2 R12.2 | length 6.6
  Top Layer w0.2: J77.B7 32.823,108.422 32.975,108.27 33.158,108.27 33.275,108.153 33.275,107.722 33.325,107.672 J77.A7 33.479,107.622 33.853,107.622 34.475,107 R10.2 37.85,107 R12.2
GND: C1.1 C2.1 C3.1 C4.1 C5.1 C6.1 C7.1 C8.1 C9.1 C10.1 C11.1 C12.1 C13.1 C14.1 IC1.8 IC1.24 IC1.36 IC1.48 IC2.1 IC3.3 IC4.4 IC4.5 J1.5 J1.6 J2.1 J5.2 J9.1 J9.2 J77.A1 J77.A12 J77.B1 J77.B12 J77.S R5.1 R6.2 R7.2 R13.1 R14.1 S1.1 S1.2 | length 5.5
  Top Layer w0.2: J2.1 83.085,118.665 83.8,117.95 83.9,117.95 84.375,117.475 R5.1
  other v2: 69,96 75,102 73.5,105 76.5,105
MOTOR_OUT1: IC4.3 J8.3 | length 39.1
  Top Layer w0.2: J8.3 94.335,93.542 89.214,98.664 88.348,99.529 88.348,103.377 83.525,108.2 83.525,110.143 83.521,110.147 83.521,111.571 83.925,111.975 93.25,111.975 94.6,110.625 IC4.3
MOTOR_OUT2: IC4.6 J8.2 | length 31.6
  Top Layer w0.2: IC4.6 87.197,110.643 86.482,110.643 85.502,111.623 84.273,111.623 83.883,111.233 83.883,110.967 83.873,110.957 83.873,110.293 84.15,110.016 84.15,109.1 85.525,107.725 85.55,107.725 88.7,104.575 88.7,99.675 96.875,91.5 J8.2
NetD1_2: D1.2 R7.1 | length 2.5
  Top Layer w0.152: D1.2 29.253,95.26 29.727,94.786 29.941,94.786 30.078,94.65 R7.1
NetD2_2: D2.2 R8.1 | length 2.6
  Top Layer w0.2: D2.2 95.108,122.098 95.558,121.647 95.558,121.365 95.875,121.048 R8.1
NetJ1_3: J1.3 R1.2 | length 6.4
  Top Layer w0.2: J1.3 38.45,98.25 40.65,98.25 41.815,97.084 41.991,97.084 R1.2
NetJ1_4: J1.4 R3.1 | length 2.7
  Top Layer w0.2: J1.4 R3.1
  Top Layer w0.381: J1.4 37.185,99.49 J1.4@37.225,99.45
NetJ77_A5: J77.A5 R13.2 | length 8.5
  Top Layer w0.152: R13.2 33.6,115.85 34.336,115.85 34.425,115.761 34.425,111.9 34.125,111.6 34.125,109.325 33.972,109.172 J77.A5
NetJ77_B5: J77.B5 R14.2 | length 6.6
  Top Layer w0.152: R14.2 30.825,106.8 31.475,107.45 32.101,107.45 J77.B5
OSCIN: C1.2 IC1.5 R2.2 Y1.2 | length 17.2
  Top Layer w0.2: IC1.5 60.685,108.859 cw(c61.209,108.337) 61.209,109.077 61.263,109.131 61.283,109.151 61.301,109.151 61.95,109.8 67.725,109.8 R2.2 68.164,109.461 68.164,109.136 70.261,107.039 70.476,107.039 71.45,106.065 Y1.2 75.025,105.85 C1.2
OSCOUT: C2.2 IC1.6 R2.1 Y1.1 | length 17.7
  Top Layer w0.2: IC1.6@60.428,109.137 62.891,111.6 R2.1 67.873,111.6 68.372,112.099 68.372,112.272 70.261,114.161 70.476,114.161 71.45,115.135 Y1.1 71.65,115.55 C2.2
PA0: IC1.10 IC4.2 J7.6 | length 64.3
  Top Layer w0.2: IC1.10@59.428,110.869 62.5,113.941 62.5,119.125 65.53,122.155 J7.6 65.53,124.803 66.448,125.721 97.629,125.721 97.748,125.602 97.748,122.996 97.723,122.971 97.723,117.229 97.748,117.204 97.748,111.192 97.375,110.819 IC4.2
PA1: IC1.11 IC4.7 J7.5 | length 82.7
  Top Layer w0.2: IC1.11@59.178,111.302 61.225,113.349 61.225,120.325 62.99,122.09 J7.5 62.99,125.09 63.973,126.073 97.777,126.073 98.1,125.75 98.1,122.85 98.075,122.825 98.075,117.375 99.425,116.025 99.425,113.725 99.075,113.375 99.075,109.642 98.958,109.525 85.775,109.525 IC4.7
PA2: IC1.12 J7.4 | length 11.2
  Top Layer w0.2: IC1.12 58.91,111.866 58.91,112.199 58.845,112.264 58.845,120.695 59.606,121.456 59.619,121.456 60.45,122.287 J7.4
PA3: IC1.13 J7.3 | length 10.9
  Top Layer w0.2: IC1.13 56.813,112.493 56.225,113.081 56.225,120.615 56.941,121.331 56.954,121.331 57.91,122.287 J7.3
PA4: IC1.14 J7.2 | length 10.6
  Top Layer w0.2: J7.2 55.37,113.303 56.018,112.655 56.018,112.571 IC1.14@56.437,112.152
PA5: IC1.15 J7.1 | length 11.8
  Top Layer w0.2: J7.1 52.83,115.157 54.412,113.575 54.6,113.575 55.578,112.597 55.578,112.52 55.639,112.459 55.639,112.267 IC1.15@56.004,111.902
PA6: IC1.16 J9.10 | length 14.5
  Top Layer w0.2: J9.10 50.01,118.09 50.7,117.4 50.7,116.575 50.725,116.55 50.725,114.044 50.842,113.927 51.856,113.927 52.764,113.019 54.518,113.019 54.91,112.628 54.928,112.609 IC1.16
PA7: IC1.17 J9.9 | length 15.7
  Top Layer w0.2: J9.9 47.47,120.194 49.658,118.006 49.658,117.944 49.864,117.738 49.864,117.424 50.192,117.096 50.192,113.692 50.31,113.575 51.71,113.575 52.618,112.667 54.058,112.667 54.939,111.786 55.081,111.541 IC1.17
PA8: IC1.29 IC3.2 J6.6 | length 112.9
  Top Layer w0.2: IC1.29@52.047,105.68 51.881,105.513 51.563,105.513 49.775,103.725 45.825,103.725 45.477,103.377 45.477,95.506 45.35,95.379 45.35,95.325 43.75,93.725 38.3,93.725 37.97,93.395 J6.6 37.97,86.18 39.577,84.573 103.323,84.573 104.65,85.9 104.65,97.405 IC3.2
PA9: IC1.30 J6.5 | length 26.1
  Top Layer w0.2: J6.5 40.51,93.11 40.75,93.35 44.175,93.35 45.875,95.05 45.875,102.925 46.323,103.373 49.921,103.373 51.628,105.08 52.131,105.08 52.297,105.247 52.477,105.35 52.559,105.35 IC1.30@52.672,105.463
PA10: IC1.31 J6.4 | length 23.4
  Top Layer w0.2: J6.4 43.05,92.75 43.298,92.998 44.321,92.998 44.323,93 44.425,93 46.375,94.95 46.375,102.85 46.546,103.021 50.067,103.021 51.692,104.647 52.381,104.647 52.547,104.814 52.662,104.88 52.772,104.88 IC1.31@52.922,105.03
PA11: IC1.32 J6.3 R10.1 R12.1 | length 45.4
  Top Layer w0.152: R10.1 R10.1@35.65,105.2 ; v1@39.231,105.2 39.331,105.1 v1(39.425,105.1)
  Top Layer w0.2: R10.1@35.65,105.2 R12.1 v1@39.231,105.2 ; J6.3 45.59,93.49 46.6,94.5 46.633,94.5 46.75,94.617 46.75,102.35 47.069,102.669 50.212,102.669 51.757,104.214 52.631,104.214 52.797,104.381 52.941,104.463 53.038,104.463 IC1.32@53.172,104.597 ; IC1.32@53.385,104.514 54.325,105.453 54.325,106.75 v1(53.775,107.3)
  Bottom Layer w0.2: v1(39.425,105.1) 43.45,109.125 49.85,109.125 51.6,107.375 53.508,107.375 53.525,107.357 53.718,107.357 v1(53.775,107.3)
PA12: IC1.33 J6.2 R9.1 R11.1 | length 43.7
  Top Layer w0.2: R9.1 R11.1 v1(39.575,110.925) ; J6.2 48.13,101.78 48.625,102.275 50.575,102.275 52.081,103.781 52.881,103.781 53.047,103.948 IC1.33@53.422,104.164 ; v1(53.175,108.375) 53.775,108.375 54.875,107.275 54.875,105.32 IC1.33@53.588,104.033
  Bottom Layer w0.2: v1(39.575,110.925) 49.05,110.925 51.65,108.325 53.075,108.325 53.125,108.375 v1(53.175,108.375)
PA15: IC1.38 J6.1 | length 16.4
  Top Layer w0.2: J6.1 50.67,94.395 57.1,100.825 57.1,101.732 56.765,102.312 56.72,102.357 IC1.38
PB0: IC1.18 IC4.1 J9.8 | length 91.3
  Top Layer w0.2: IC1.18 54.569,111.173 54.569,111.322 54.337,111.554 54.337,111.705 54.115,111.927 53.923,111.927 53.675,112.175 53.531,112.175 53.525,112.18 52.607,112.18 51.861,112.926 50.06,112.926 50.002,112.985 49.772,113.214 49.772,113.227 49.682,113.317 49.637,113.317 49.512,113.442 49.512,117.313 48.908,117.917 48.908,118.258 47.099,120.067 45.112,120.067 45.051,120.129 44.992,120.187 44.992,122.188 44.934,122.246 J9.8 44.93,125.281 46.074,126.425 97.923,126.425 98.452,125.896 98.452,119.776 98.427,119.751 98.427,117.573 99.915,116.085 IC4.1
PB1: IC1.19 J9.7 | length 21.3
  Top Layer w0.2: J9.7 42.39,119.394 42.507,119.277 46.546,119.277 46.669,119.154 47.514,119.154 48.556,118.112 48.556,117.771 48.9,117.427 48.9,112.589 48.989,112.5 51.789,112.5 52.461,111.828 53.38,111.828 53.647,111.561 54.272,110.936 IC1.19@54.272,110.902
PB3: IC1.39 J5.10 | length 15.8
  Top Layer w0.2: J5.10 53.47,96.495 57.725,100.75 57.725,101.775 57.443,102.057 57.153,102.559 IC1.39
PB4: IC1.40 J5.9 | length 15.2
  Top Layer w0.2: J5.9 56.01,98.36 58.198,100.548 58.198,100.965 58.171,100.992 58.171,102.029 57.853,102.347 57.586,102.809 IC1.40
PB5: IC1.41 J5.8 | length 14.5
  Top Layer w0.2: IC1.41@57.954,103.172 58.327,102.799 58.327,102.641 58.523,102.445 58.523,101.138 58.55,101.111 J5.8
PB6: IC1.42 J5.7 | length 15.6
  Top Layer w0.2: IC1.42@58.387,103.422 58.76,103.049 58.76,102.891 59,102.651 59,101.325 59.625,100.7 59.625,91.5 60.746,90.379 60.746,89.269 J5.7
PB7: IC1.43 J5.6 | length 17.2
  Top Layer w0.2: IC1.43@58.82,103.672 59.225,103.267 59.225,103.174 59.375,103.024 59.375,102.168 60.058,101.485 60.058,92.142 61.375,90.825 62.243,90.825 63.63,89.438 J5.6
PB8: IC1.45 J5.5 | length 17.9
  Top Layer w0.2: IC1.45@59.686,104.172 62.825,101.033 62.825,92.27 65.201,89.894 65.214,89.894 66.17,88.938 J5.5
PB9: IC1.46 J5.4 | length 19.1
  Top Layer w0.2: IC1.46 60.185,104.34 63.575,100.95 63.575,94.06 67.741,89.894 67.754,89.894 68.71,88.938 J5.4
PB10: IC1.21 J9.6 | length 23.5
  Top Layer w0.2: J9.6 39.85,119.042 39.967,118.925 46.4,118.925 46.621,118.704 47.467,118.704 48.204,117.967 48.204,117.625 48.45,117.379 48.45,112.5 48.841,112.109 48.9,112.05 51.741,112.05 52.465,111.326 52.567,111.326 52.705,111.188 52.705,111.17 53.348,110.527 IC1.21
PB11: IC1.22 J9.5 | length 26.1
  Top Layer w0.2: J9.5 37.31,118.539 37.399,118.45 46.325,118.45 46.423,118.352 47.321,118.352 47.852,117.821 47.852,117.48 47.975,117.357 47.975,112.348 48.898,111.425 51.775,111.425 52.915,110.285 IC1.22
PB12: IC1.25 IC3.8 J6.10 | length 154.3
  Top Layer w0.2: IC1.25 51.292,107.35 50.986,107.35 50.839,107.203 50.778,107.203 48.825,105.25 48.125,105.25 48.096,105.221 44.494,105.221 44.474,105.2 44.2,105.2 43.775,104.775 43.775,95.971 43.004,95.2 43,95.2 42.946,95.146 33.803,95.146 33.782,95.125 33.325,95.125 33,94.8 33,93.8 32.125,92.925 28.325,92.925 27.81,92.41 J6.10 27.81,84.04 28.685,83.165 104.556,83.165 105.825,84.434 105.825,84.511 106.081,84.767 106.081,111.127 IC3.8
PB13: IC1.26 IC3.7 J6.9 | length 145
  Top Layer w0.2: IC1.26 51.723,107.065 51.612,107.065 51.499,106.999 51.332,106.833 51.086,106.833 49.122,104.869 44.64,104.869 44.398,104.627 44.398,95.92 43.272,94.794 33.949,94.794 33.448,94.293 33.448,93.646 32.273,92.471 30.801,92.471 30.551,92.221 30.551,89.101 J6.9 30.35,84.525 31.358,83.517 104.117,83.517 105.729,85.129 105.729,109.026 IC3.7
PB14: IC1.27 IC3.5 J6.8 | length 142.4
  Top Layer w0.2: IC1.27 51.809,106.697 51.547,106.546 51.391,106.389 51.289,106.389 51,106.1 50.975,106.1 49.35,104.475 45.175,104.475 44.75,104.05 44.75,95.774 43.418,94.442 34.142,94.442 33.8,94.1 33.8,93.5 32.89,92.59 J6.8 32.89,85.085 34.106,83.869 103.719,83.869 105.275,85.425 105.275,85.427 105.377,85.529 105.377,108.748 103.725,110.4 102.192,110.4 101.955,110.163 101.955,107.851 IC3.5
PB15: IC1.28 IC3.6 J6.7 | length 129.5
  Top Layer w0.2: IC1.28@51.797,106.113 51.631,105.946 51.396,105.946 49.55,104.1 45.5,104.1 45.125,103.725 45.125,95.651 43.564,94.09 36.065,94.09 35.43,93.455 J6.7 35.43,85.645 36.854,84.221 103.571,84.221 105.025,85.675 105.025,107.23 IC3.6
PC13: IC1.2 J7.9 R8.2 | length 65.2
  Top Layer w0.2: v1(58.95,107.325) 58.976,107.299 58.976,106.974 59.4,106.55 60.05,106.55 60.594,107.094 61.13,107.403 61.149,107.422 IC1.2@61.229,107.503 ; J7.9 73.15,124.1 73.398,124.348 76.627,124.348 79.15,121.825 79.15,117.575 82.625,114.1 ; v1(80.975,113.4) 81.925,113.4 82.625,114.1 ; R8.2 94.125,119.95 93.65,119.475 93.617,119.475 93.5,119.358 93.5,118 91.575,116.075 91.575,114.217 91.458,114.1 82.625,114.1
  Bottom Layer w0.2: v1(58.95,107.325) 58.95,109.25 60.9,111.2 60.9,111.95 62.35,113.4 v1(80.975,113.4)
PC14: C3.2 IC1.3 J7.8 Y2.1 | length 53.5
  Top Layer w0.2: IC1.3@61.152,107.846 61.517,108.211 61.709,108.211 61.823,108.325 64.3,108.325 66.325,106.3 66.325,102.225 70.691,97.859 70.691,97.649 71.315,97.025 Y2.1 71.625,96.925 C3.2 74.683,97.208 75.283,97.208 77.825,99.75 77.825,116.525 75.3,119.05 70.727,119.05 70.61,119.167 J7.8
PC15: C4.2 IC1.4 J7.7 Y2.2 | length 50.9
  Top Layer w0.2: IC1.4@60.902,108.279 61.267,108.644 61.459,108.644 61.515,108.7 65.1,108.7 66.7,107.1 66.7,104.25 70.691,100.259 70.691,100.049 71.315,99.425 Y2.2 71.6,99.35 C4.2 74.889,99.839 75.239,99.839 77.175,101.775 77.175,116.225 74.9,118.5 68.925,118.5 68.07,119.355 J7.7
RESET: C9.2 IC1.7 J9.4 R4.1 S1.3 S1.4 | length 84.4
  Top Layer w0.2: J9.4 34.77,121.487 35.5,120.757 v1(35.5,119) ; IC1.7@60.19,109.577 60.556,109.943 60.709,109.943 60.719,109.953 60.746,109.953 62.475,111.682 v1(62.475,112.15) 64.525,114.2 v1(64.525,116.8) ; S1.4 80.76,91.56 81.61,91.56 83.375,93.325 83.475,93.325 83.95,93.8 R4.1 ; v1(81.025,95.325) 82.525,95.325 83.375,94.475 83.475,94.475 83.95,94 R4.1 ; S1.3 86.79,91.2 86.673,91.317 86.205,91.785 86.205,93.67 C9.2 R4.1
  Bottom Layer w0.2: v1(35.5,119) 48,119 48.225,119.225 50.65,116.8 v1(64.525,116.8) ; v1(62.475,112.15) 79.3,95.325 v1(81.025,95.325)
SWCLK: IC1.37 J2.3 R6.1 | length 50.9
  Top Layer w0.2: IC1.37@56.213,102.337 56.213,102.45 55.889,102.775 55.775,102.775 55.775,104.95 57.423,106.598 57.423,109.874 57.8,110.251 v1(57.8,110.275) ; J2.3 88.165,117.76 R6.1 88.55,115.725 v1(88.6,115.675)
  Bottom Layer w0.2: v1(57.8,110.275) 57.825,110.3 57.825,110.525 58.75,111.45 58.75,114.625 59.15,115.025 87.95,115.025 v1(88.6,115.675)
SWDIO: IC1.34 J2.2 R5.2 | length 48.6
  Top Layer w0.2: IC1.34@53.844,103.606 54.256,104.018 54.323,104.018 55.4,105.096 v1(55.4,106.75) ; J2.2 85.625,118.067 85.65,118.042 85.65,117.85 R5.2 86.125,115.675 v1(86.15,115.65)
  Bottom Layer w0.2: v1(55.4,106.75) 55.4,106.831 55.514,106.945 55.514,107.014 56.3,107.8 56.3,110.325 57.875,111.9 57.875,115.175 58.35,115.65 v1(86.15,115.65)
VBAT: IC1.1 J7.10 | length 54.8
  Top Layer w0.2: IC1.1 61.902,107.037 62.289,107.425 63.125,107.425 65.775,104.775 65.775,101.65 69.6,97.825 69.6,94.425 70.4,93.625 75.425,93.625 76,94.2 76,95.225 78.725,97.95 78.725,117.375 75.69,120.41 J7.10
VCC: C5.2 C6.2 C7.2 C8.2 C10.2 C13.2 C14.2 D1.1 D2.1 IC1.9 IC1.23 IC1.35 IC1.47 IC2.2 IC2.4 IC3.1 J1.1 J1.2 J2.4 J5.1 J9.3 R4.2 | length 254.6
  Top Layer w0.2: C7.2 C8.2 28.442,101.467 27.842,101.467 27.675,101.3 27.675,98.525 27.013,97.863 D1.1 27.213,95.475 28.013,96.275 28.013,96.475 29.887,98.35 33.47,98.35 J1.2 ; C5.2 28.925,116.025 C6.2 C10.2 31.15,121.157 31.398,121.406 J9.3@32.23,122.237 ; J9.3@32.23,122.75 J9.3@32.23,122.237 ; J1.1 J1.2 ; C14.2 C13.2@43,108.125 ; v1(49.075,106.85) 49.05,106.875 49.05,107 49.05,110.775 ; v1(51.4,102.025) 51.457,102.082 51.682,102.082 52.275,102.675 53,102.675 53.2,102.875 53.341,102.875 53.391,102.925 53.549,102.925 IC1.35@53.88,103.256 ; IC1.23@52.548,109.928 51.701,110.775 49.05,110.775 ; IC1.9@59.465,110.519 57.775,108.83 v1(57.775,105.55) 59.971,105.55 IC1.47@60.683,104.838 ; IC1.47 60.762,104.61 60.762,104.462 60.925,104.299 60.925,104.141 60.986,104.08 60.986,104.037 61.473,103.55 61.475,103.55 65.5,99.525 65.5,96.2 69.1,92.6 75.25,92.6 ; J2.4 90.705,122.338 91.661,123.294 91.674,123.294 92.718,124.338 D2.1 94.825,124.138 95.625,123.338 95.825,123.338 97.325,121.838 97.325,118.55 92.925,114.15 92.925,112.717 92.808,112.6 79.892,112.6 79.775,112.483 79.775,97.05 78.3,95.575 78.3,94.15 78.55,93.9 R4.2 82.2,93.8 81.725,93.325 81.625,93.325 80.9,92.6 75.25,92.6 ; IC3.1 103.839,95.811 103.839,85.586 103.177,84.925 76.775,84.925 76.33,85.37 J5.1 76.33,91.52 75.25,92.6 ; J9.3@32.23,122.237 32.23,119.145 33.4,117.975 42.675,117.975 43.075,117.575 43.25,117.575 IC2.2@43.625,117.2 ; J1.2 34.61,101.835 36.5,103.725 41.4,103.725 41.825,104.15 41.825,107.7 42.142,108.017 42.892,108.017 C13.2@43,108.125 ; C13.2@43,108.125 C13.2 43.025,109.775 43.575,110.325 IC2.4 IC2.2 IC2.2@43.625,117.2 ; IC2.2@43.625,117.2 44,117.575 44.175,117.575 44.6,118 47.175,118 47.5,117.675 47.5,112.325 49.05,110.775
  Bottom Layer w0.2: v1(49.075,106.85) 49.075,105.775 ; v1(51.4,102.025) 51.3,101.925 50.625,101.925 50.608,101.908 50.442,101.908 49.075,103.275 49.075,105.775 ; v1(57.775,105.55) 57.725,105.5 49.35,105.5 49.075,105.775
pads on no net: IC3.4 IC4.9 IC4.10 IC4.11 IC4.12 IC4.13 IC4.14 IC4.15 IC4.16 J77.A2 J77.A3 J77.A8 J77.A10 J77.A11 J77.B2 J77.B3 J77.B8 J77.B10 J77.B11

## Polygon pours and split planes (outlines as drawn)
GND on Bottom Layer "GND_L02_P001" (solid, pour order 1): 25.45,127.9 108.125,127.9 108.2,127.825 108.2,82.55 25.425,82.55 25.45,82.575
GND on Top Layer "GND_L01_P000" (solid, pour order 0): 25.45,127.85 25.5,127.9 108.125,127.9 108.125,82.625 108.1,82.6 25.425,82.6 25.425,127.875

## Silkscreen, mask and mechanical layers (free items; w line width, h text height)
Top Overlay:
  text "VCC" at 34.814,101.051 h1 r90
  text "GND" at 40.589,101.025 h1 r90
  text "BOOT1" at 36.116,101 h0.8 r90
  text "GND" at 40.089,93.3 h1 r90
  text "VCC" at 34.789,93.226 h1 r90
  text "BOOT0" at 37.414,92.4 h1 r90
Top Solder:
  text "PA5" at 52.964,125.25 h1 r90
  text "PA4" at 55.525,125.25 h1 r90
  text "PA3" at 58.164,125.25 h1 r90
  text "PA2" at 60.825,125.25 h1 r90
  text "PA1" at 63.4,125.25 h1 r90
  text "PA0" at 65.964,125.25 h1 r90
  text "PC15" at 68.314,125.25 h1 r90
  text "PC14" at 70.964,125.25 h1 r90
  text "PC13" at 73.464,125.25 h1 r90
  text "VBAT" at 75.975,125.251 h1 r90
  text "GND" at 27.289,125.2 h1 r90
  text "GND" at 29.914,125.2 h1 r90
  text "VCC" at 32.439,125.201 h1 r90
  text "RESET" at 35.04,125.2 h0.9 r90
  text "PB11" at 37.575,125.2 h1 r90
  text "PB10" at 39.964,125.2 h1 r90
  text "PB1" at 42.575,125.2 h1 r90
  text "PB0" at 45.239,125.2 h1 r90
  text "PA7" at 47.75,125.2 h1 r90
  text "PA6" at 50.289,125.2 h1 r90
  text "It was designed as open source by Ugur and Aydın." at 107.332,89.725 h2 r90
  text "5V" at 99.889,83.85 h1 r90
  text "PB12" at 28,83.5 h1 r90
  text "PB13" at 30.554,83.5 h1 r90
  text "PB14" at 33.155,83.5 h1 r90
  text "PB15" at 35.794,83.5 h1 r90
  text "PA8" at 38.419,83.5 h1 r90
  text "PA9" at 40.869,83.5 h1 r90
  text "PA10" at 43.339,83.5 h1 r90
  text "PA11" at 45.925,83.5 h1 r90
  text "PA12" at 48.5,83.5 h1 r90
  text "PA15" at 50.914,83.5 h1 r90
  text "PB3" at 53.664,83.5 h1 r90
  text "PB4" at 56.4,83.5 h1 r90
  text "PB5" at 58.839,83.5 h1 r90
  text "PB6" at 61.414,83.5 h1 r90
  text "PB7" at 64.15,83.5 h1 r90
  text "PB8" at 66.514,83.5 h1 r90
  text "PB9" at 69.014,83.5 h1 r90
  text "5V" at 71.489,83.5 h1 r90
  text "GND" at 74.164,83.5 h1 r90
  text "VCC" at 76.664,83.501 h1 r90
  text "MOTOR" at 94.714,82.75 h1 r90
  text "MOTOR" at 97.214,82.725 h1 r90
Mechanical 13:
  lines w0.1: 108.175,82.575 25.45,82.575 ; 25.45,82.575 25.45,127.875 ; 25.45,82.575 25.45,127.875 ; 25.45,127.875 108.125,127.875 ; 25.45,127.875 108.125,127.875 ; 108.125,127.875 108.125,82.575 108.125,93.669 108.125,115.856 108.125,127.875

## Dimensions
25.45,82.575 to 25.45,127.875 on Top Overlay
25.45,127.875 to 108.125,127.875 on Top Overlay